# EAGLE board CT_schematic (EAGLE 7.6.0)

Size 100 x 80 mm. Coordinates in mm from the lower left corner, seen from the top.
Outline: 0,0 100,0 100,80 0,80 0,0
Copper layers (1*16): Top 0.035mm / dielectric 1.5mm / Bottom 0.035mm
Design rules "default": minimum track width 10mil, minimum drill 24mil, track to track 8mil, track to pad 8mil, pad to pad 8mil, via to via 8mil, smd to smd 8mil, copper to edge 40mil, drill to drill 8mil, minimum pad ring 10mil, minimum via ring 8mil, stop-mask expansion 4mil, vias tented up to drill 0mil, thermal gap 10mil

## Footprints (pad centres in the part's own frame; a part is rotated, then mirrored left to right if it is on the bottom)
C0603 = smd 0.8 x 0.8: 1 -0.762,0; 2 0.762,0
C0402 = smd 0.5 x 0.5: 1 -0.508,0; 2 0.508,0
C1210 = smd 1.2 x 2.5: 1 -1.524,0; 2 1.524,0
C1206 = smd 1.3 x 1.6: 1 -1.524,0; 2 1.524,0
L1210 = smd 1.2 x 2.5: 1 -1.524,0; 2 1.524,0
R0603 = smd 0.8 x 0.8: 1 -0.762,0; 2 0.762,0
WLCSP64 = smd 0.34 x 0.34: A1 -1.75,1.75; A2 -1.25,1.75; A3 -0.75,1.75; A4 -0.25,1.75; A5 0.25,1.75; A6 0.75,1.75; A7 1.25,1.75; A8 1.75,1.75; B1 -1.75,1.25; B2 -1.25,1.25; B3 -0.75,1.25; B4 -0.25,1.25; B5 0.25,1.25; B6 0.75,1.25; B7 1.25,1.25; B8 1.75,1.25; C1 -1.75,0.75; C2 -1.25,0.75; C3 -0.75,0.75; C4 -0.25,0.75; C5 0.25,0.75; C6 0.75,0.75; C7 1.25,0.75; C8 1.75,0.75; D1 -1.75,0.25; D2 -1.25,0.25; D3 -0.75,0.25; D4 -0.25,0.25; D5 0.25,0.25; D6 0.75,0.25; D7 1.25,0.25; D8 1.75,0.25; E1 -1.75,-0.25; E2 -1.25,-0.25; E3 -0.75,-0.25; E4 -0.25,-0.25; E5 0.25,-0.25; E6 0.75,-0.25; E7 1.25,-0.25; E8 1.75,-0.25; F1 -1.75,-0.75; F2 -1.25,-0.75; F3 -0.75,-0.75; F4 -0.25,-0.75; F5 0.25,-0.75; F6 0.75,-0.75; F7 1.25,-0.75; F8 1.75,-0.75; G1 -1.75,-1.25; G2 -1.25,-1.25; G3 -0.75,-1.25; G4 -0.25,-1.25; G5 0.25,-1.25; G6 0.75,-1.25; G7 1.25,-1.25; G8 1.75,-1.25; H1 -1.75,-1.75; H2 -1.25,-1.75; H3 -0.75,-1.75; H4 -0.25,-1.75; H5 0.25,-1.75; H6 0.75,-1.75; H7 1.25,-1.75; H8 1.75,-1.75
SOIC-8 = smd 1.6 x 0.6: 1 -2.7,1.905 | smd 1.55 x 0.6: 2 -2.7,0.635; 3 -2.7,-0.635; 4 -2.7,-1.905; 5 2.7,-1.905; 6 2.7,-0.635; 7 2.7,0.635; 8 2.7,1.905
TST-110-05-T-D-RA = drill 1 pad 1.7 square: 1 0,0 | drill 1 pad 1.7: 2 0,2.54; 3 2.54,0; 4 2.54,2.54; 5 5.08,0; 6 5.08,2.54; 7 7.62,0; 8 7.62,2.54; 9 10.16,0; 10 10.16,2.54; 11 12.7,0; 12 12.7,2.54; 13 15.24,0; 14 15.24,2.54; 15 17.78,0; 16 17.78,2.54; 17 20.32,0; 18 20.32,2.54; 19 22.86,0; 20 22.86,2.54
182-009-MALE = drill 1.194 pad 1.524 octagon: 1 -5.537,10.923; 2 -2.769,10.923; 3 0,10.923; 4 2.769,10.923; 5 5.537,10.923; 6 -4.153,8.08; 7 -1.384,8.08; 8 1.384,8.08; 9 4.153,8.08 | hole 3.048: -12.446,9.501; 12.446,9.501
ABLS-25.000MHZ-B2F-T = smd 5.6 x 2.8: 1 -3.81,0; 2 5.69,0
ASEK = smd 1.4 x 1: 1 -1.1,-0.8; 2 1.1,-0.8; 3 1.1,0.8; 4 -1.1,0.8
SOIC-8_EP = smd 1.6 x 0.533: 1 -2.921,1.905; 2 -2.921,0.635; 3 -2.921,-0.635; 4 -2.921,-1.905; 5 2.921,-1.905; 6 2.921,-0.635; 7 2.921,0.635; 8 2.921,1.905 | smd 2.54 x 3.302: EPAD 0,0 | drill 0.406 pad 0.406: P$1 -0.508,0.635; P$2 0.381,0.635; P$3 -0.508,-0.635; P$4 0.381,-0.635
DFN-8_DDB = smd 0.805 x 0.3: 1 -0.952,0.75; 2 -0.952,0.25; 3 -0.952,-0.25; 4 -0.952,-0.75; 5 0.952,-0.75; 6 0.952,-0.25; 7 0.952,0.25; 8 0.952,0.75 | smd 0.61 x 2.2: 9 0,0
DFN8_2X3MC = smd 0.813 x 0.305: 1 -1.398,0.75; 2 -1.398,0.25; 3 -1.398,-0.25; 4 -1.398,-0.75; 5 1.398,-0.75; 6 1.398,-0.25; 7 1.398,0.25; 8 1.398,0.75 | smd 1.753 x 1.549: 9 0,0
JST-2-SMD = smd 1 x 4.6: 1 -1,-3.7; 2 1,-3.7 | smd 1.6 x 3.4: NC1 -3.4,1.5; NC2 3.4,1.5
FCI_10118193-0001LF = smd 0.4 x 1.35: 1 -1.3,2.675; 2 -0.65,2.675; 3 0,2.675; 4 0.65,2.675; 5 1.3,2.675 | smd 1.6 x 1.4: 6 -3.2,2.45; 7 3.2,2.45 | smd 1.9 x 1.9: 8 -1.2,0; 9 1.2,0 | hole 0.5: -3.3,0; 3.3,0
SON-6 = smd 0.55 x 0.3: 1 -0.355,0.5 | smd 0.52 x 0.3: 2 -0.37,0; 3 -0.37,-0.5; 4 0.37,-0.5; 5 0.37,0; 6 0.37,0.5
SW_4-1437565-2 = smd 1.4 x 2.1: 1 -2.23,4.55; 2 -2.23,-4.55; 3 2.23,4.55; 4 2.23,-4.55
LGM67K-G1J2-24-Z = smd 0.8 x 1.4: A -2,0; C 0,0
NC7SZ125M5X = smd 1.3 x 0.7: 1 -1.3,0.95; 2 -1.3,0; 3 -1.3,-0.95; 4 1.3,-0.95; 5 1.3,0.95

## Placement (x,y rotation side)
C1  1e-06  [C0603]  -40.64,64.77 0 top  (outside the outline)
C2  1e-07  [C0603]  -44.45,64.77 0 top  (outside the outline)
C3  1e-07  [C0603]  -48.26,64.77 0 top  (outside the outline)
C4  1e-07  [C0603]  -52.07,64.77 0 top  (outside the outline)
C5  1e-07  [C0603]  -55.88,64.77 0 top  (outside the outline)
C6  1e-07  [C0603]  -59.69,64.77 0 top  (outside the outline)
C7  4.7e-06  [C0603]  -29.21,64.77 0 top  (outside the outline)
C8  1e-08  [C0603]  -63.5,64.77 0 top  (outside the outline)
C9  1e-06  [C0603]  -67.31,64.77 0 top  (outside the outline)
C10  1e-11  [C0402]  -41.91,69.85 0 top  (outside the outline)
C11  1e-11  [C0402]  -45.72,69.85 0 top  (outside the outline)
C12  1e-08  [C0402]  -49.53,69.85 0 top  (outside the outline)
C13  1e-07  [C0402]  -53.34,69.85 0 top  (outside the outline)
C14  1e-06  [C0603]  -71.12,64.77 0 top  (outside the outline)
C15  1e-06  [C0603]  -15.24,69.85 0 top  (outside the outline)
C16  1e-08  [C0402]  -57.15,69.85 0 top  (outside the outline)
C17  1e-05  [C1210]  -16.51,53.34 0 top  (outside the outline)
C18  1e-05  [C1210]  -22.86,53.34 0 top  (outside the outline)
C19  1e-05  [C1210]  -29.21,53.34 0 top  (outside the outline)
C20  1e-05  [C1210]  -35.56,53.34 0 top  (outside the outline)
C21  1e-05  [C1210]  -41.91,53.34 0 top  (outside the outline)
C22  2.2e-06  [C0603]  -33.02,64.77 0 top  (outside the outline)
C23  2.2e-07  [C0603]  -36.83,64.77 0 top  (outside the outline)
C24  1e-07  [C0402]  -60.96,69.85 0 top  (outside the outline)
C25  1e-05  [C1206]  -54.61,53.34 0 top  (outside the outline)
C26  1e-05  [C1206]  -60.96,53.34 0 top  (outside the outline)
C27  1e-08  [C0402]  -64.77,69.85 0 top  (outside the outline)
C28  1e-08  [C0402]  -68.58,69.85 0 top  (outside the outline)
I1  1e-05  [L1210]  -48.26,53.34 0 top  (outside the outline)
R2  1000.0  [R0603]  -19.05,69.85 0 top  (outside the outline)
R4  4700.0  [R0603]  -22.86,69.85 0 top  (outside the outline)
R5  10000.0  [R0603]  -50.8,58.42 0 top  (outside the outline)
R6  10000.0  [R0603]  -55.88,58.42 0 top  (outside the outline)
R7  10000.0  [R0603]  -60.96,58.42 0 top  (outside the outline)
R8  10000.0  [R0603]  -66.04,58.42 0 top  (outside the outline)
R9  10000.0  [R0603]  -71.12,58.42 0 top  (outside the outline)
R10  120.0  [R0603]  -26.67,69.85 0 top  (outside the outline)
R11  4031.5447154472  [R0603]  -25.4,58.42 0 top  (outside the outline)
R12  2200.0  [R0603]  -30.48,69.85 0 top  (outside the outline)
R13  100000.0  [R0603]  -30.48,58.42 0 top  (outside the outline)
R14  560000.0  [R0603]  -35.56,58.42 0 top  (outside the outline)
R15  10000.0  [R0603]  -15.24,64.77 0 top  (outside the outline)
R16  10000.0  [R0603]  -20.32,64.77 0 top  (outside the outline)
R17  9100.0  [R0603]  -34.29,69.85 0 top  (outside the outline)
R18  680000.0  [R0603]  -40.64,58.42 0 top  (outside the outline)
R19  120000.0  [R0603]  -45.72,58.42 0 top  (outside the outline)
R20  2000.0  [R0603]  -38.1,69.85 0 top  (outside the outline)
R21  10000.0  [R0603]  -25.4,64.77 0 top  (outside the outline)
U1  STM32L431RBY6  [WLCSP64]  -69.85,26.67 0 top  (outside the outline)
U2  AT25M01-SSHM-T  [SOIC-8]  -39.37,27.94 0 top  (outside the outline)
U3  TST-110-05-T-D-RA  [TST-110-05-T-D-RA]  -58.42,35.56 0 top  (outside the outline)
U4  MCP2562-E/SN  [SOIC-8]  -53.34,27.94 0 top  (outside the outline)
U5  182-009-113R531  [182-009-MALE]  -36.83,6.35 0 top  (outside the outline)
U6  ABLS-25.000MHZ-B2F-T  [ABLS-25.000MHZ-B2F-T]  -45.72,45.72 0 top  (outside the outline)
U7  ASEK-32.768KHz-ECST  [ASEK]  -29.21,45.72 0 top  (outside the outline)
U8  MIC5234YME  [SOIC-8_EP]  -57.15,45.72 0 top  (outside the outline)
U9  LT3494AEDDB#TRMPBF  [DFN-8_DDB]  -15.24,74.93 0 top  (outside the outline)
U10  MCP73831T-2ACI/MC  [DFN8_2X3MC]  -26.67,73.66 0 top  (outside the outline)
U11  S2B-PH-SM4-TB(LF)(SN)  [JST-2-SMD]  -22.86,29.21 0 top  (outside the outline)
U12  10118193-0001LF  [FCI_10118193-0001LF]  -19.05,36.83 0 top  (outside the outline)
U13  TPS3895ADRYR  [SON-6]  -20.32,73.66 0 top  (outside the outline)
U14  4-1437565-2  [SW_4-1437565-2]  -67.31,6.35 0 top  (outside the outline)
U15  Q65110A2395  [LGM67K-G1J2-24-Z]  -66.04,45.72 0 top  (outside the outline)
U16  nc7sz125m5x  [NC7SZ125M5X]  -66.04,52.07 0 top  (outside the outline)
U17  nc7sz125m5x  [NC7SZ125M5X]  -15.24,58.42 0 top  (outside the outline)

## Library data of the parts
C1-C28 I1 R2 R4-R21 U1-U17 = circuit_tree

## Nets
CLK_CRYSTAL_U1_D7: C10.1 U1.D7 U6.1
CLK_CRYSTAL_U1_D8: C11.1 U1.D8 U6.2
CLK_U1_C8: U1.C8 U7.3
GND: C1.2 C2.2 C3.2 C4.2 C5.2 C6.2 C7.2 C8.2 C9.2 C10.2 C11.2 C12.2 C13.2 C14.2 C15.2 C16.2 C17.2 C18.2 C19.2 C20.2 C21.2 C22.2 C23.2 C24.2 C25.2 C26.2 C27.2 C28.2 R2.2 R5.2 R12.2 R17.2 R19.2 R20.2 U1.A7 U1.B1 U1.F8 U1.H2 U1.H8 U2.4 U3.4 U3.6 U3.8 U3.10 U3.12 U3.14 U3.16 U3.18 U3.20 U4.2 U4.8 U5.5 U7.2 U8.7 U8.EPAD U9.2 U9.9 U10.6 U10.9 U11.2 U12.5 U12.6 U12.7 U12.8 U12.9 U13.2 U15.C U16.2 U16.3 U17.1 U17.3
INPUT_USBPOWER_5V: C25.1 R21.2 U10.1 U10.2 U12.1
NET_U1_C5: R5.1 U1.C5
NET_U1_D6: R4.1 U1.D6 U17.4
NET_U1_H5: U15.A
NET_U1_H6: U14.3 U14.4
NET_U2_3: R6.1 U2.3
NET_U2_7: R8.1 U2.7
NET_U4_6: R10.2 U4.6
NET_U5_2: R10.2 U4.6 U5.2
NET_U5_3: R10.1 U4.7 U5.3
NET_U8_4: R11.2 R12.1 U8.4
NET_U9_1: I1.1 U9.1
NET_U9_5: R13.1 U9.5
NET_U9_6: R14.1 U9.6
NET_U9_8: C23.1 U9.8
NET_U10_5: R21.1 U10.5
NET_U10_8: R20.1 U10.8
NET_U13_1: R16.1 R17.1 U13.1
NET_U13_3: R18.2 R19.1 U13.3
NET_U13_4: R15.1 U13.4 U16.4 U17.2
NET_U14_1: R2.1 U14.1 U14.2
PROC_CAN1_RX: U1.C6 U4.4
PROC_CAN1_TX: U1.B6 U4.1
PROC_SPI1_MISO: U1.B4 U2.2
PROC_SPI1_MOSI: U1.C1 U2.5
PROC_SPI1_NSS: R7.1 U1.A2 U2.1
PROC_SPI1_SCK: U1.F5 U2.6
PROC_SYS_JTCK_SWCLK: U1.B2 U3.9
PROC_SYS_JTDO_SWO: U1.A5 U3.13
PROC_SYS_JTMS_SWDIO: U1.C2 U3.7
RST_OUT_U3_SRESET_B: R9.1 U3.15 U16.1
VCC_S1_3V7: C17.1 C18.1 C21.1 C26.1 I1.2 R13.2 U8.5 U8.8 U9.3 U9.4 U10.3 U10.4 U11.1
VCC_TIER1_3V3: C1.1 C2.1 C3.1 C4.1 C5.1 C6.1 C7.1 C8.1 C9.1 C12.1 C13.1 C15.1 C16.1 C19.1 C20.1 C24.1 C27.1 C28.1 R4.2 R6.2 R7.2 R8.2 R9.2 R11.1 R15.2 R16.2 R18.1 U1.A1 U1.A8 U1.B7 U1.G8 U1.H1 U1.H7 U2.8 U3.1 U4.5 U7.4 U8.1 U13.6 U16.5 U17.5
VCC_TIER1_5V0: C14.1 C22.1 R14.2 U4.3 U9.7

## Tracks (layer width: path | path; a pad name or v marks a point on that pad's centre or on a via)
CLK_CRYSTAL_U1_D7  (2 unrouted)
CLK_CRYSTAL_U1_D8  (2 unrouted)
CLK_U1_C8  (1 unrouted)
GND  (70 unrouted)
INPUT_USBPOWER_5V  (4 unrouted)
NET_U1_C5  (1 unrouted)
NET_U1_D6  (2 unrouted)
NET_U1_H6  (1 unrouted)
NET_U2_3  (1 unrouted)
NET_U2_7  (1 unrouted)
NET_U4_6  (1 unrouted)
NET_U5_2  (2 unrouted)
NET_U5_3  (2 unrouted)
NET_U8_4  (2 unrouted)
NET_U9_1  (1 unrouted)
NET_U9_5  (1 unrouted)
NET_U9_6  (1 unrouted)
NET_U9_8  (1 unrouted)
NET_U10_5  (1 unrouted)
NET_U10_8  (1 unrouted)
NET_U13_1  (2 unrouted)
NET_U13_3  (2 unrouted)
NET_U13_4  (3 unrouted)
NET_U14_1  (2 unrouted)
PROC_CAN1_RX  (1 unrouted)
PROC_CAN1_TX  (1 unrouted)
PROC_SPI1_MISO  (1 unrouted)
PROC_SPI1_MOSI  (1 unrouted)
PROC_SPI1_NSS  (2 unrouted)
PROC_SPI1_SCK  (1 unrouted)
PROC_SYS_JTCK_SWCLK  (1 unrouted)
PROC_SYS_JTDO_SWO  (1 unrouted)
PROC_SYS_JTMS_SWDIO  (1 unrouted)
RST_OUT_U3_SRESET_B  (2 unrouted)
VCC_S1_3V7  (12 unrouted)
VCC_TIER1_3V3  (40 unrouted)
VCC_TIER1_5V0  (4 unrouted)